# EAGLE board NMEA2000_USB (EAGLE 8.0.1)
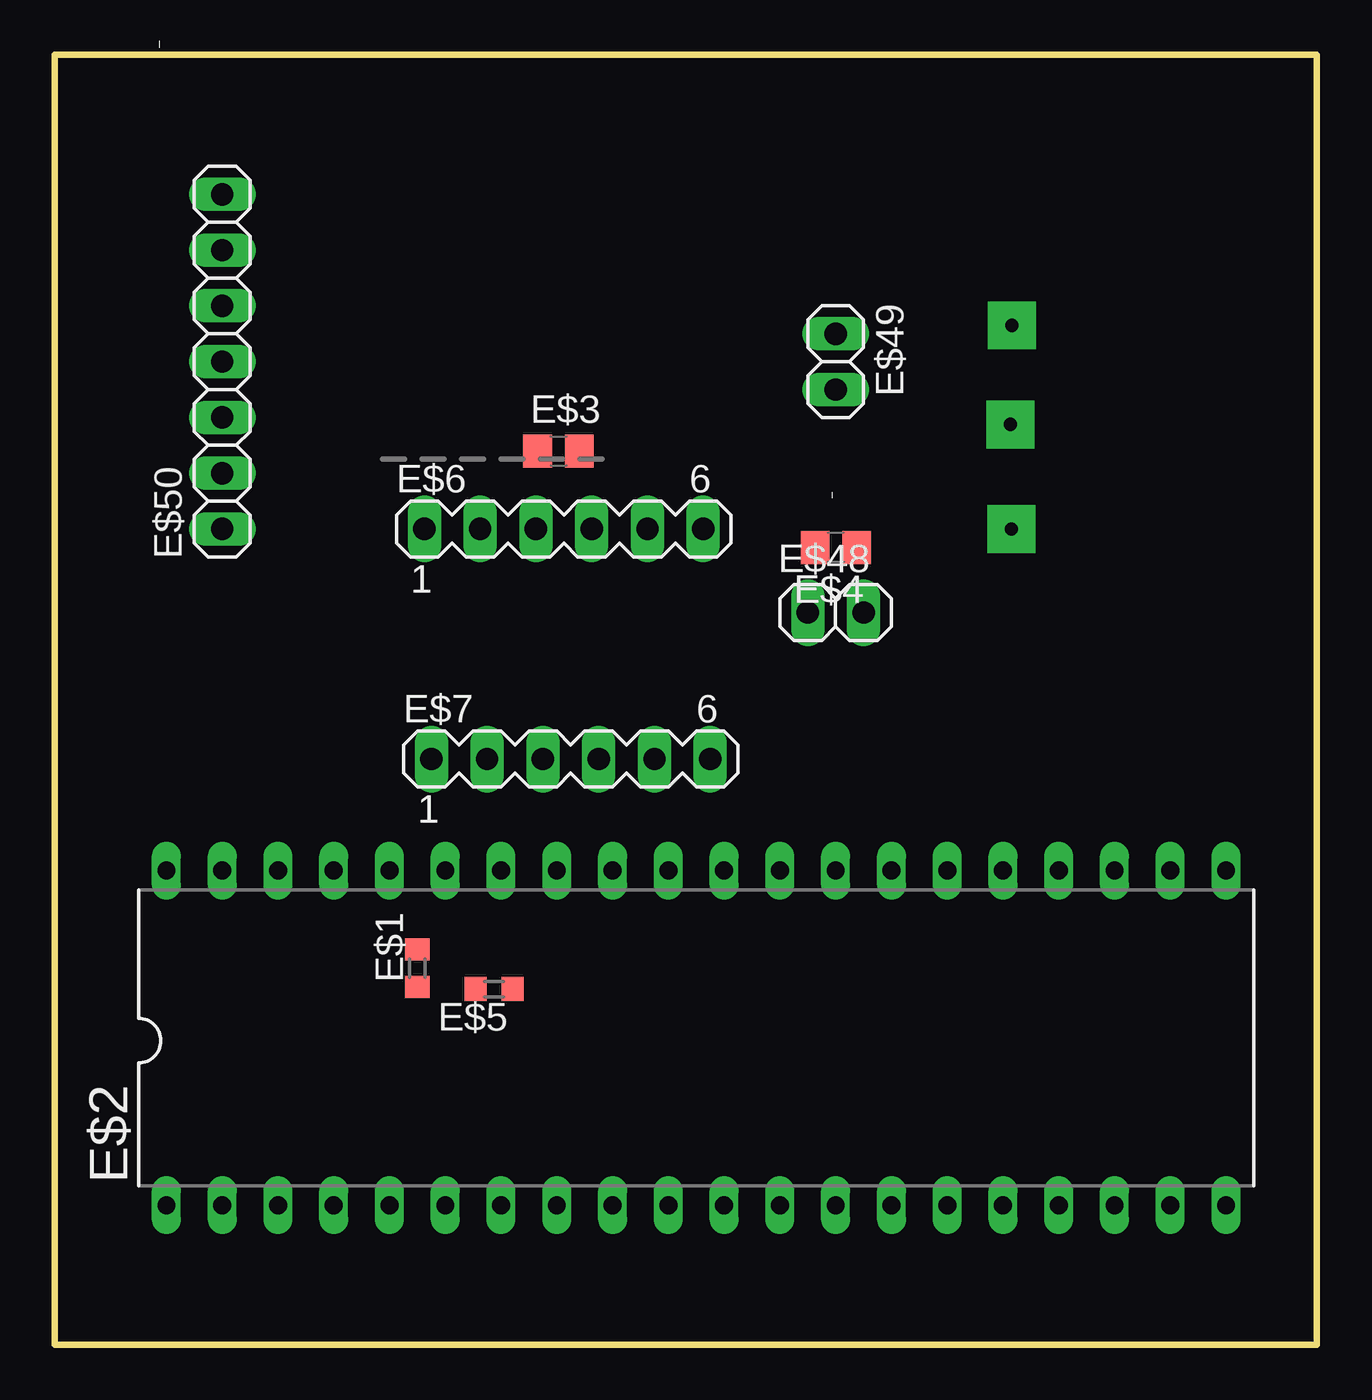
[diagram p0: board, top side]
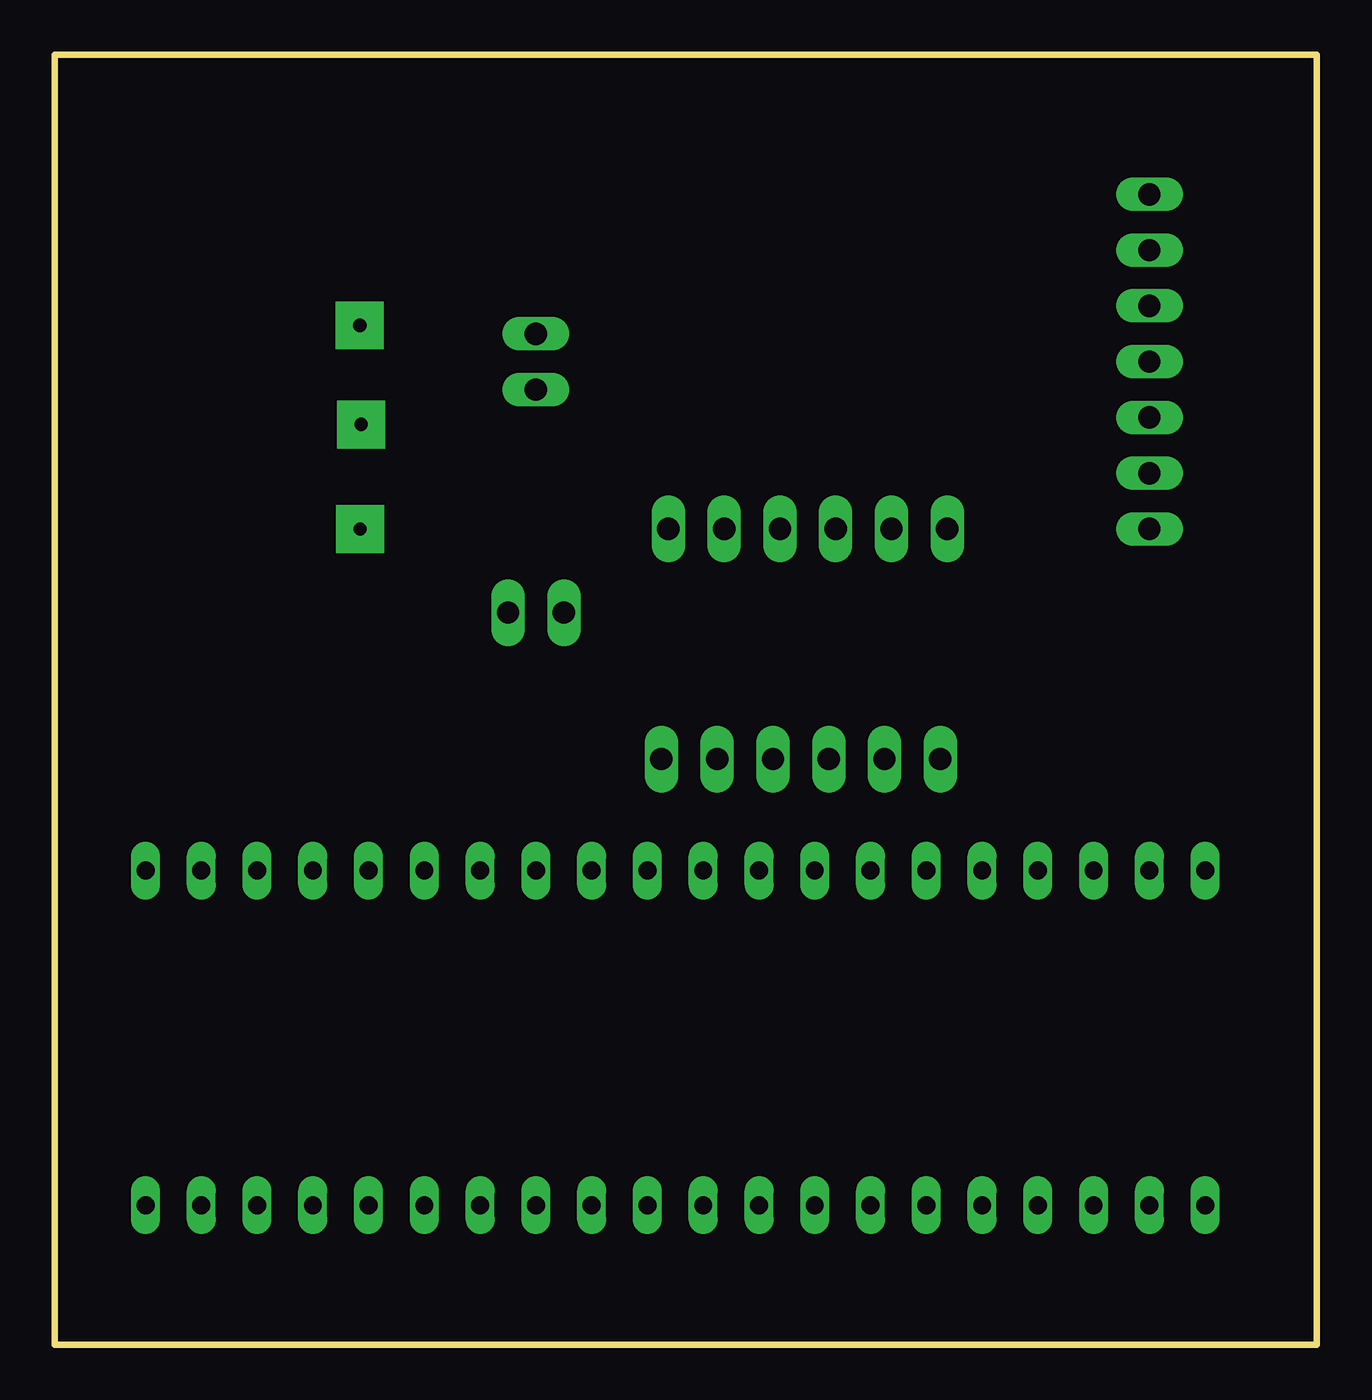
[diagram p1: board, bottom side, seen from below]

Size 57.47 x 58.74 mm. Coordinates in mm from the lower left corner, seen from the top.
Outline: 0,58.74 0,0 57.47,0 57.47,58.74 0,58.74
Copper layers (1*16): Top 0.035mm / dielectric 1.5mm / Bottom 0.035mm
Design rules "default": minimum track width 10mil, minimum drill 24mil, track to track 8mil, track to pad 8mil, pad to pad 8mil, via to via 8mil, smd to smd 8mil, copper to edge 40mil, drill to drill 8mil, minimum pad ring 10mil, minimum via ring 8mil, stop-mask expansion 4mil, vias tented up to drill 0mil, thermal gap 10mil

## Footprints (pad centres in the part's own frame; a part is rotated, then mirrored left to right if it is on the bottom)
R0603 = smd 1 x 1.1: 1 -0.85,0; 2 0.85,0
DIL40 = drill 0.813 long: 1 -24.13,-7.62; 2 -21.59,-7.62; 3 -19.05,-7.62; 4 -16.51,-7.62; 5 -13.97,-7.62; 6 -11.43,-7.62; 7 -8.89,-7.62; 8 -6.35,-7.62; 9 -3.81,-7.62; 10 -1.27,-7.62; 11 1.27,-7.62; 12 3.81,-7.62; 13 6.35,-7.62; 14 8.89,-7.62; 15 11.43,-7.62; 16 13.97,-7.62; 17 16.51,-7.62; 18 19.05,-7.62; 19 21.59,-7.62; 20 24.13,-7.62; 21 24.13,7.62; 22 21.59,7.62; 23 19.05,7.62; 24 16.51,7.62; 25 13.97,7.62; 26 11.43,7.62; 27 8.89,7.62; 28 6.35,7.62; 29 3.81,7.62; 30 1.27,7.62; 31 -1.27,7.62; 32 -3.81,7.62; 33 -6.35,7.62; 34 -8.89,7.62; 35 -11.43,7.62; 36 -13.97,7.62; 37 -16.51,7.62; 38 -19.05,7.62; 39 -21.59,7.62; 40 -24.13,7.62
C0805 = smd 1.3 x 1.5: 1 -0.95,0; 2 0.95,0
MA06-1 = drill 1.016 long: 1 -6.35,0; 2 -3.81,0; 3 -1.27,0; 4 1.27,0; 5 3.81,0; 6 6.35,0
1X02 = drill 1.016 long: 1 -1.27,0; 2 1.27,0
1X07 = drill 1.016 long: 1 -7.62,0; 2 -5.08,0; 3 -2.54,0; 4 0,0; 5 2.54,0; 6 5.08,0; 7 7.62,0

## Placement (x,y rotation side)
E$1  [R0603]  16.51,17.14 90 top
E$2  [DIL40]  29.21,13.97 0 top
E$3  [C0805]  22.93,40.69 0 top
E$4  [C0805]  35.57,36.31 180 top
E$5  [R0603]  20,16.19 180 top
E$6  [MA06-1]  23.18,37.15 0 top
E$7  [MA06-1]  23.5,26.67 0 top
E$48  [1X02]  35.56,33.34 0 top
E$49  [1X02]  35.56,44.77 270 top
E$50  [1X07]  7.62,44.77 90 top

## Library data of the parts
E$1 E$3-E$5 = smd-ipc
E$2 = ref-packages-longpad
E$6 E$7 = con-lstb
E$48-E$50 = pinhead

## Tracks (layer width: path | path; a pad name or v marks a point on that pad's centre or on a via)
S$1  (via drill 0.6 pad 2.18)
  other vias: 43.58,46.42
S$2  (via drill 0.6 pad 2.18)
  other vias: 43.52,41.91
S$5  (via drill 0.6 pad 2.18)
  other vias: 43.56,37.15
S$103
  Bottom 0.254: 8.89,42.23 8.57,42.23

## Text on the board
Pads: NMEA 2000-USB | Int | MCP2515 | Clk | H | MOSI | MISO | CS | L | GND | GND | 5V | SI | SO | Clk | CS | Maple mini | USB | D7 | D2